# Altium PCB SensorsConnectorBrd.PcbDoc
Units mm, origin at the board's own origin, x right, y up, seen from the top; angles counter-clockwise.
Board outline 65 x 15 mm, 2 copper layers (Top Layer, Bottom Layer); 8 components, 3 nets, 40 pads, 0 vias.
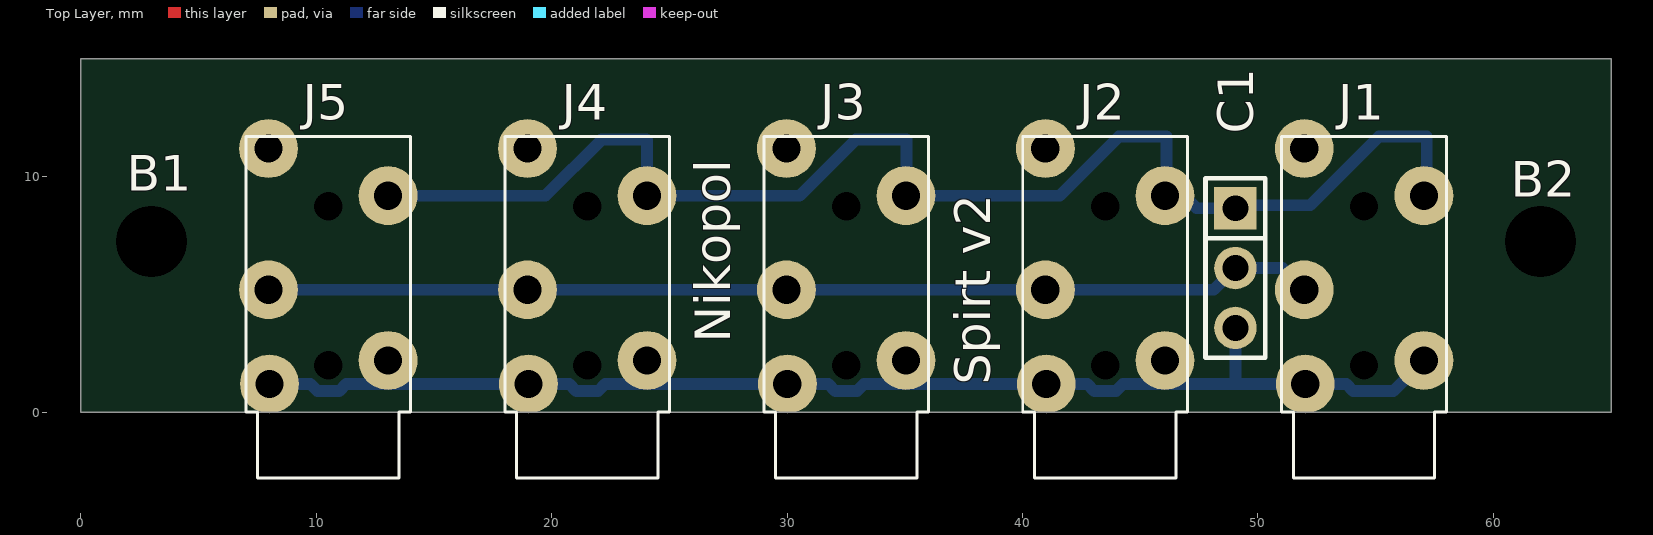
[diagram p0: Top Layer view]
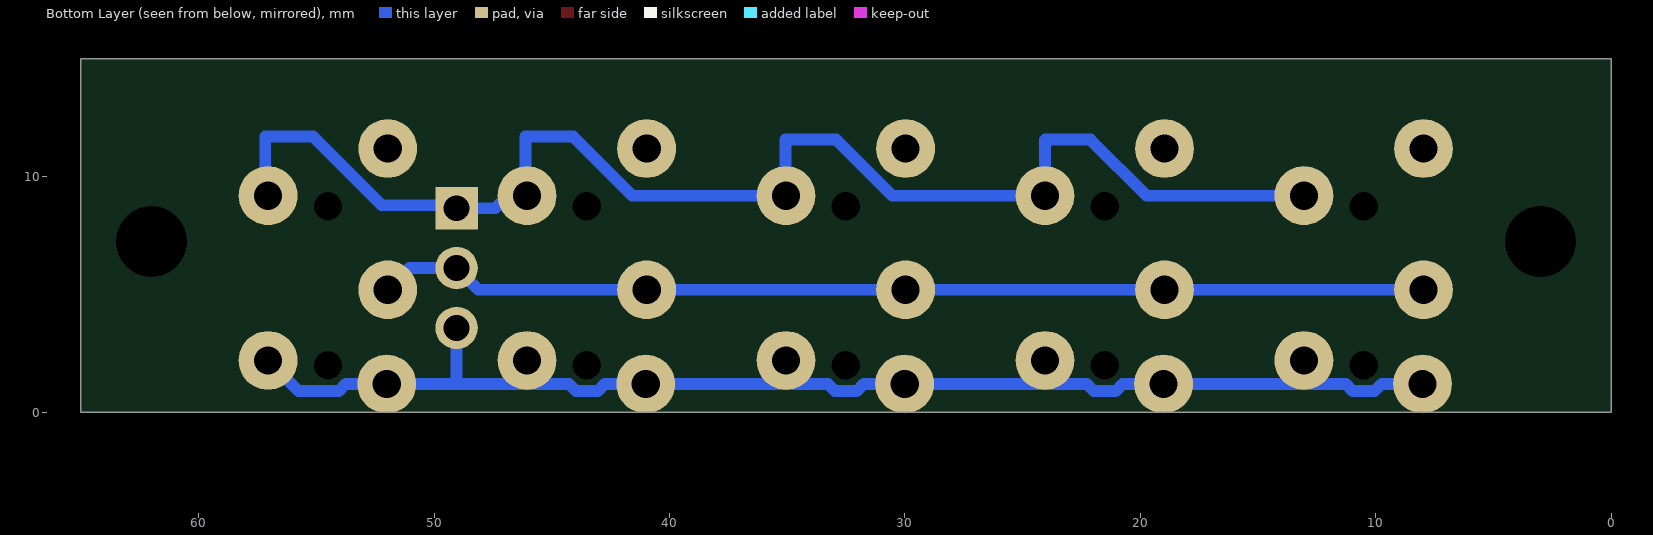
[diagram p1: Bottom Layer view, seen from below]
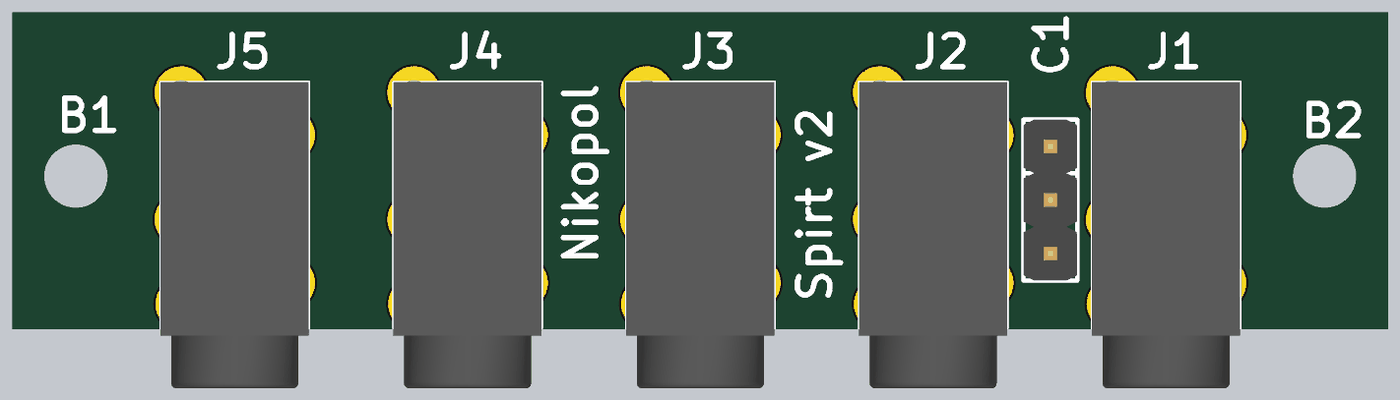
[diagram p2: 3D render of the assembled board from above, using the file's embedded part models]

## Layer stack, top to bottom
Top Solder: solder mask 0.0102, Solder Resist, Dk 3.5
Top Layer: signal copper 0.0356
Dielectric 1: dielectric 0.32, FR-4, Dk 4.8
Bottom Layer: signal copper 0.0356
Bottom Solder: solder mask 0.0102, Solder Resist, Dk 3.5

## Board outline
0,0 65,0 65,15 0,15

## Design rules (kind name [scope] priority, off if disabled: settings)
Clearance [All] p1: gap=0.254
PolygonConnect [All] p1: connectstyle=Relief reliefconductorwidth=0.254 reliefentries=4 polygonreliefangle="90 Angle" airgapwidth=0.254
RoutingVias [All] p1: holewidth=0.711 width=1.27 viastyle="Through Hole" minholewidth=0.711 minwidth=1.27 maxholewidth=0.711 maxwidth=1.27
SolderMaskExpansion [All] p1: expansion=0.102
UnpouredPolygon [All] p1: allowunpoured=FALSE
Width [All] p1: maxlimit=5 minlimit=0.254 preferedwidth=0.5
29 further rules are at their usual default settings.

## Components (designator, comment, footprint, x,y, rotation, side; value= is the part's Value field where it differs from the comment)
B1 "Non Plated Hole" MTG300#1 3.194,7.131 r0 top
B2 "Non Plated Hole" MTG300#2 61.995,6.877 r0 top
C1 "WE-2.54 mm Pin Header & Jumper 61300311121" 61300311121 49.041,8.655 r270 top
J1 "jack 3.5" "Jak-Ph St 6x14" 54.508,5.492 r0 top
J2 "jack 3.5" "Jak-Ph St 6x14" 43.508,5.492 r0 top
J3 "jack 3.5" "Jak-Ph St 6x14" 32.508,5.492 r0 top
J4 "jack 3.5" "Jak-Ph St 6x14" 21.508,5.492 r0 top
J5 "jack 3.5" "Jak-Ph St 6x14" 10.508,5.492 r0 top

## Footprints (in the part's own frame and the unit in brackets; to place one, negate y for a bottom-side part, rotate by r counter-clockwise, add the part's x,y. Pads: shape width x height; smd on the part's side, far side on the other; paste and mask are expansions set on the pad)
61300311121 [mm] "3 pins, 1 row, straight, gold plating"
  rect 1.8x1.8 hole 1.1: 1(0,0)
  round 1.8 hole 1.1: 2(2.54,0) 3(5.08,0)
  silkscreen extent -1.27,-1.27 6.35,1.27, body extent -1.27,-1.27 6.35,1.27, height 8.54
"Jak-Ph St 6x14" [mm]
  round 0 hole 1.2 unplated: 0(0,-3.5) 0(0,3.25)
  round 2.5 hole 1.2 paste+0 mask+0.102: 1(2.54,-3.3)
  round 2.5 hole 1.2: 2(-2.5,-4.3) 3(-2.54,-0.3) 4(2.54,3.7) 5(-2.54,5.7)
  silkscreen extent -3.5,-8.28 3.5,6.22, body extent -3.5,-8.28 3.5,6.22, height 6
MTG300#1 [mm] "Non Plated Through Hole: Hole Dia.=3.0mm"
  round 2.7 hole 3 unplated: 1(-0.194,0.115)
MTG300#2 [mm] "Non Plated Through Hole: Hole Dia.=3.0mm"
  round 2.7 hole 3 unplated: 1(0.005,0.369)

## Part data
B1 B2: library part NON-PLATED_HOLE3.0, "Single Terminal Socket"
C1: "WR-PHD 2.54mm Pin Header"

## Nets (pads, with @x,y where several pads share a name; then routed paths per layer and width w, separated by ;. In a path a pad name is that pad's centre, name@x,y a point inside that pad or via, vN(x,y) a via of type N, cw(c..) or ccw(c..) an arc to the next point about the centre after c; other vN are vias at no path point)
NetC1_1: C1.1 J1.4 J2.4 J3.4 J4.4 J5.4 | length 59.5
  Top Layer w0.5: J4.4@24.022,9.218 J4.4 ; J3.4 J3.4@35.071,9.215 ; J2.4@46.12,9.264 J2.4@46.729,8.655
  Bottom Layer w0.5: J5.4 19.733,9.192 22.117,11.576 24.022,11.576 24.048,11.55 J4.4 30.528,9.192 32.912,11.576 35.071,11.576 35.071,9.215 J3.4 41.577,9.192 44.088,11.703 46.12,11.703 46.12,9.264 J2.4 46.853,9.192 47.39,8.655 C1.1 49.168,8.782 52.216,8.782 55.137,11.703 57.169,11.703 57.169,9.313 J1.4
NetC1_2: C1.2 J1.3 J2.3 J3.3 J4.3 J5.3 | length 44.8
  Bottom Layer w0.5: J5.3 J4.3 J3.3 J2.3 48.118,5.192 C1.2 51.045,6.115 J1.3
NetC1_3: C1.3 J1.1 J1.2 J2.1 J2.2 J3.1 J3.2 J4.1 J4.2 J5.1 J5.2 | length 53.1
  Bottom Layer w0.5: J5.2 9.747,1.192 10.051,0.888 10.965,0.888 11.269,1.192 J4.2 20.747,1.192 21.051,0.888 21.965,0.888 22.269,1.192 J3.2 31.747,1.192 32.051,0.888 32.965,0.888 33.269,1.192 J2.2 42.747,1.192 43.051,0.888 43.965,0.888 44.269,1.192 49.168,1.192 ; C1.3 49.041,1.319 49.168,1.192 ; J1.1 55.744,0.888 54.051,0.888 53.747,1.192 J1.2 49.168,1.192
pads on no net: B1.1 B2.1 J1.0 J1.5 J2.0 J2.5 J3.0 J3.5 J4.0 J4.5 J5.0 J5.5

## Silkscreen, mask and mechanical layers (free items; w line width, h text height)
Top Overlay:
  text "Nikopol" at 27.578,2.939 h1.52 r90
  text "Spirt v2" at 38.627,1.162 h1.52 r90
Mechanical 1:
  the board outline again, w0.254